# Altium PCB DO NOT USE LKAS-EPS_PCB_V2I3.PcbDoc (part 1 of 2)
Units mil, origin at the board's own origin, x right, y up, seen from the top; angles counter-clockwise.
Board outline 2098 x 1350 mil, 4 copper layers (Top Layer, Layer 1, Layer 2, Bottom Layer), stack 23.712 mil thick; 50 components, 66 nets, 279 pads, 105 vias.
Unrouted connection lines stored in the file: 1.
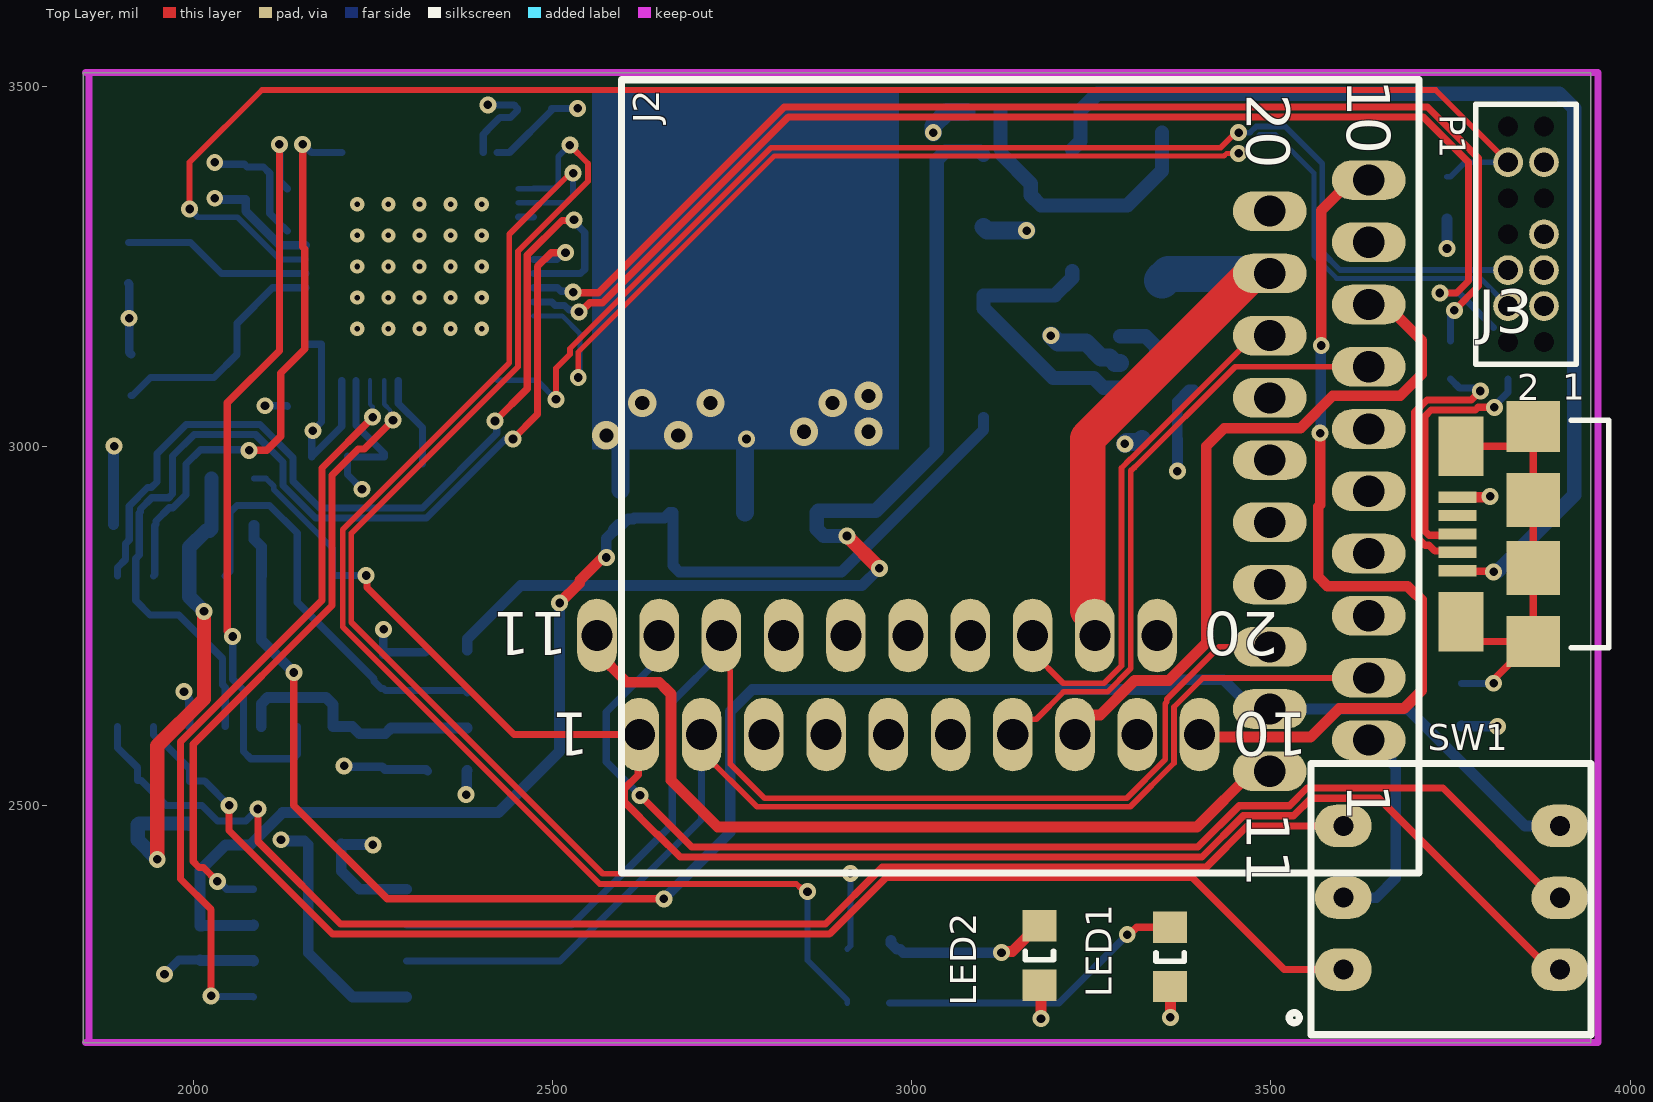
[diagram p0: Top Layer view]
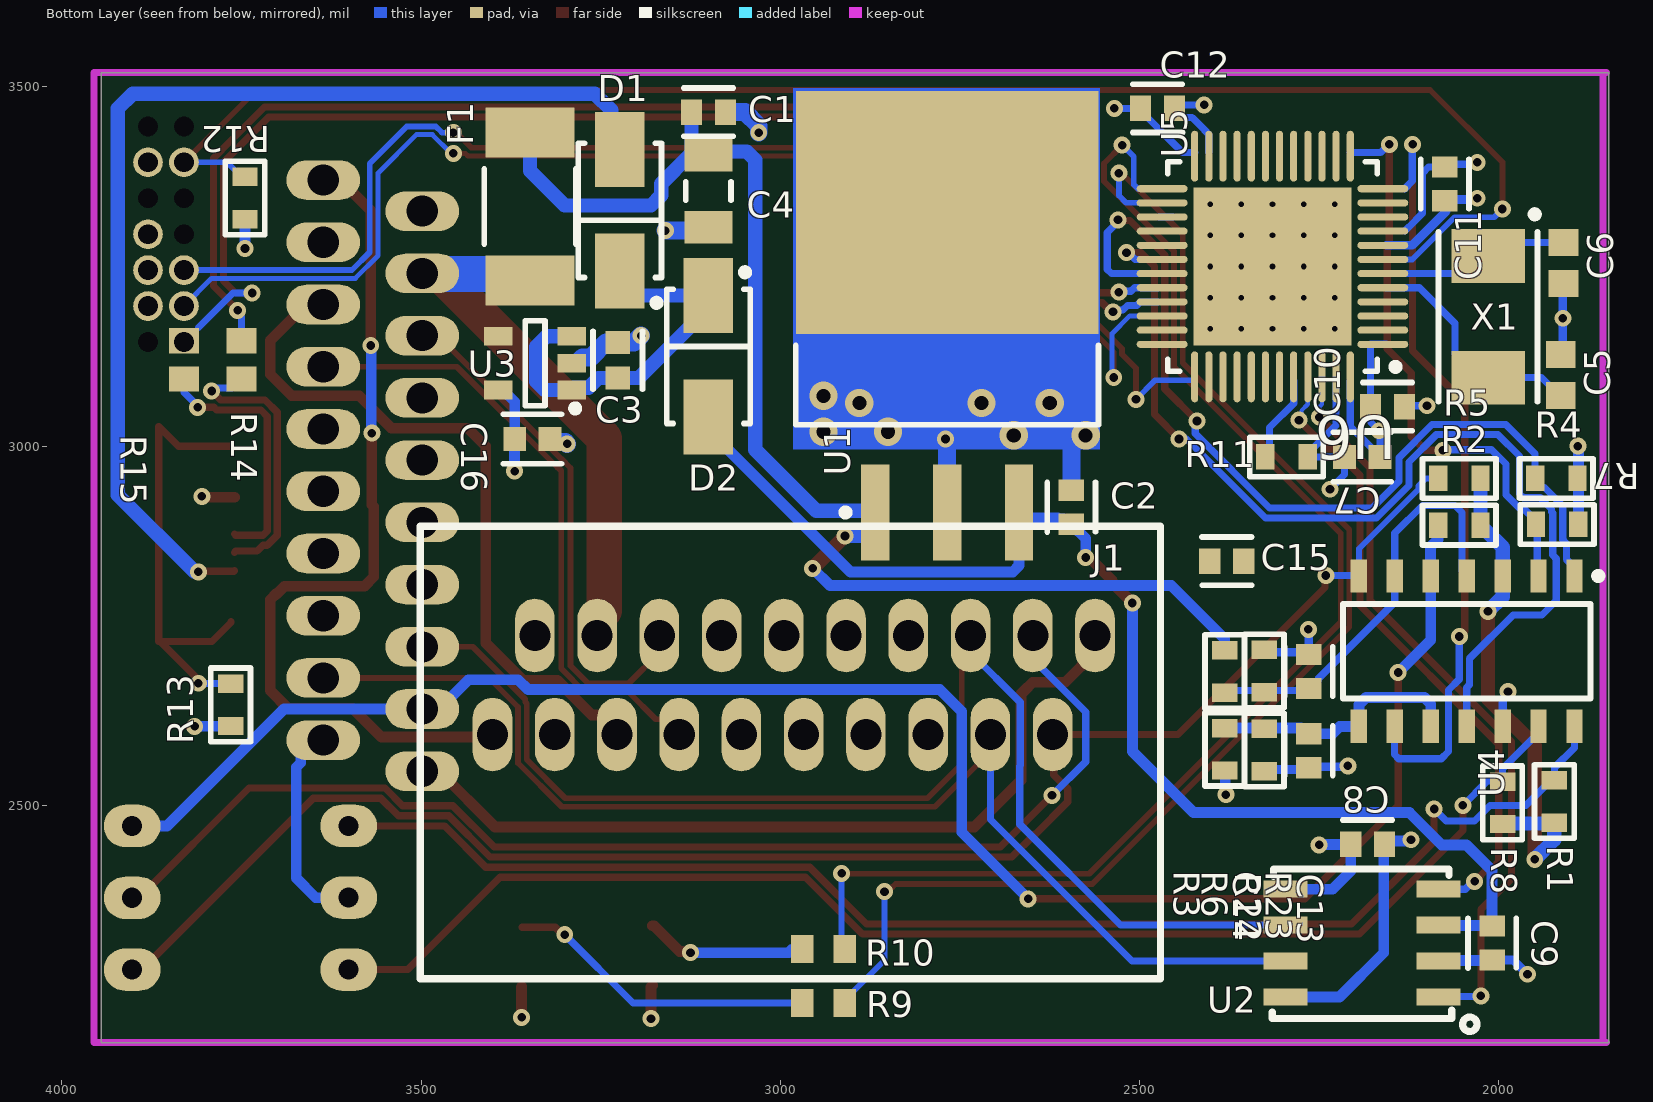
[diagram p1: Bottom Layer view, seen from below]
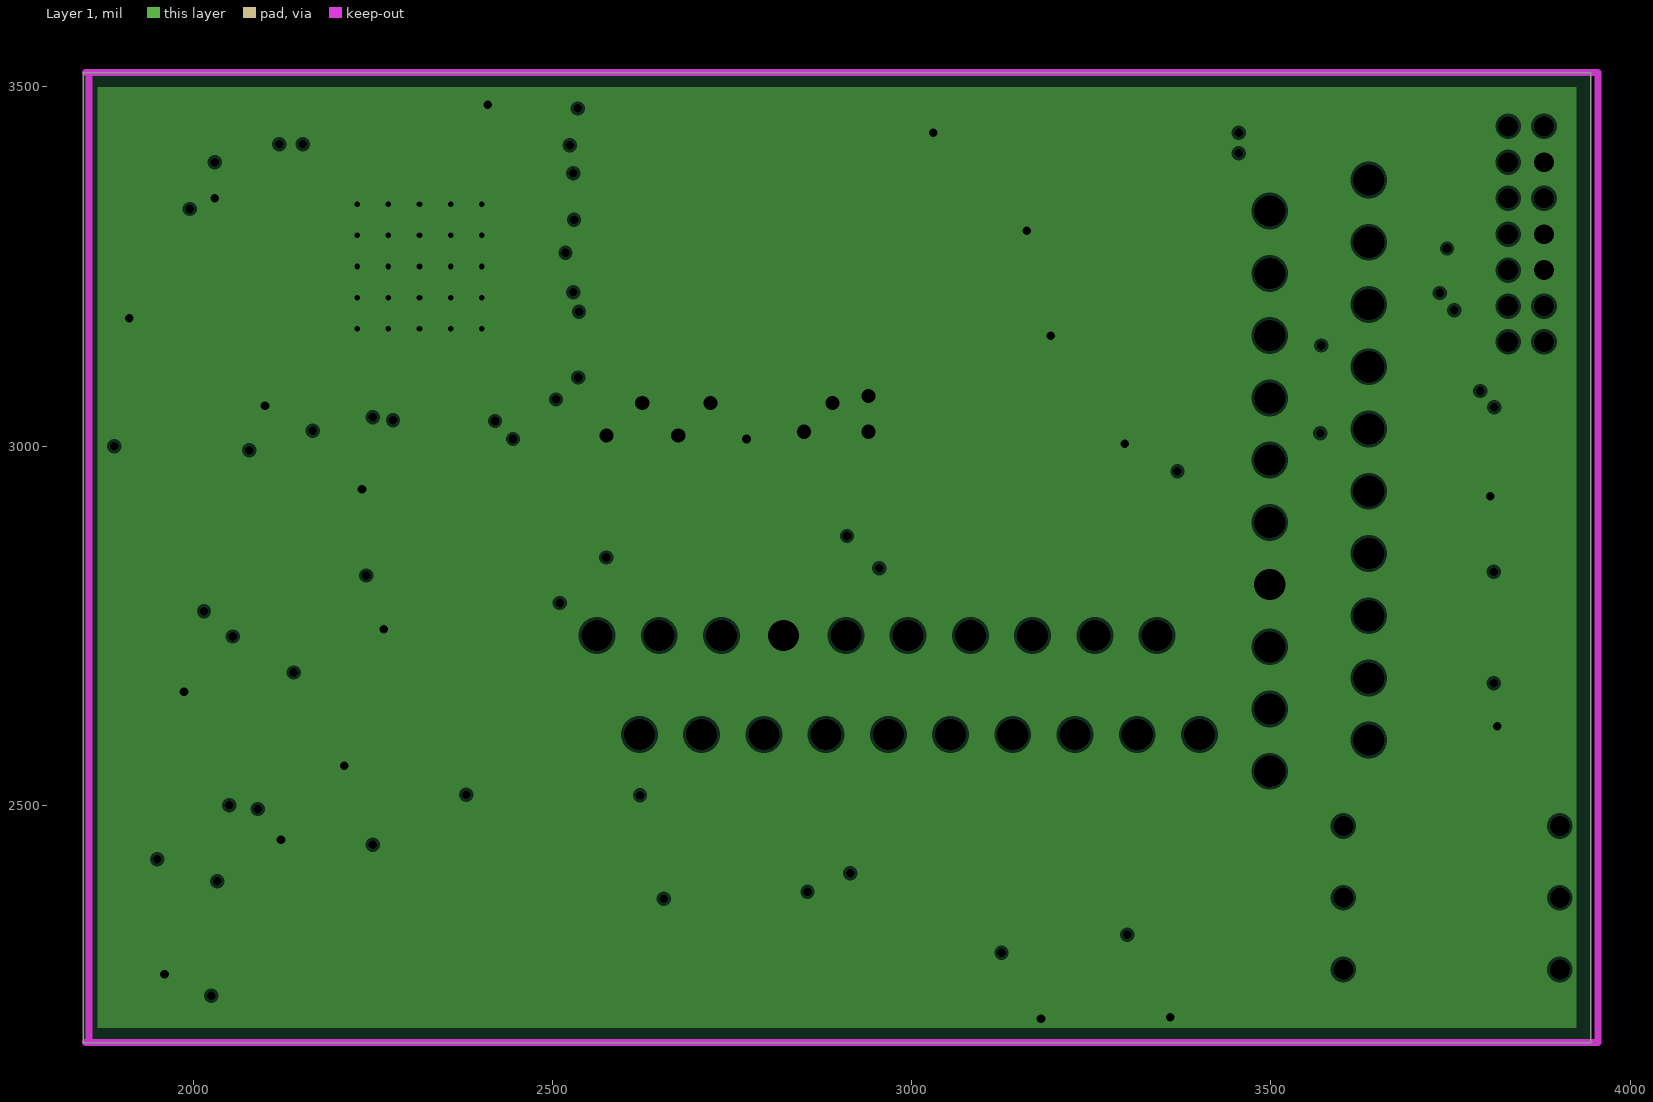
[diagram p2: Layer 1, clearances drawn from the general rule]
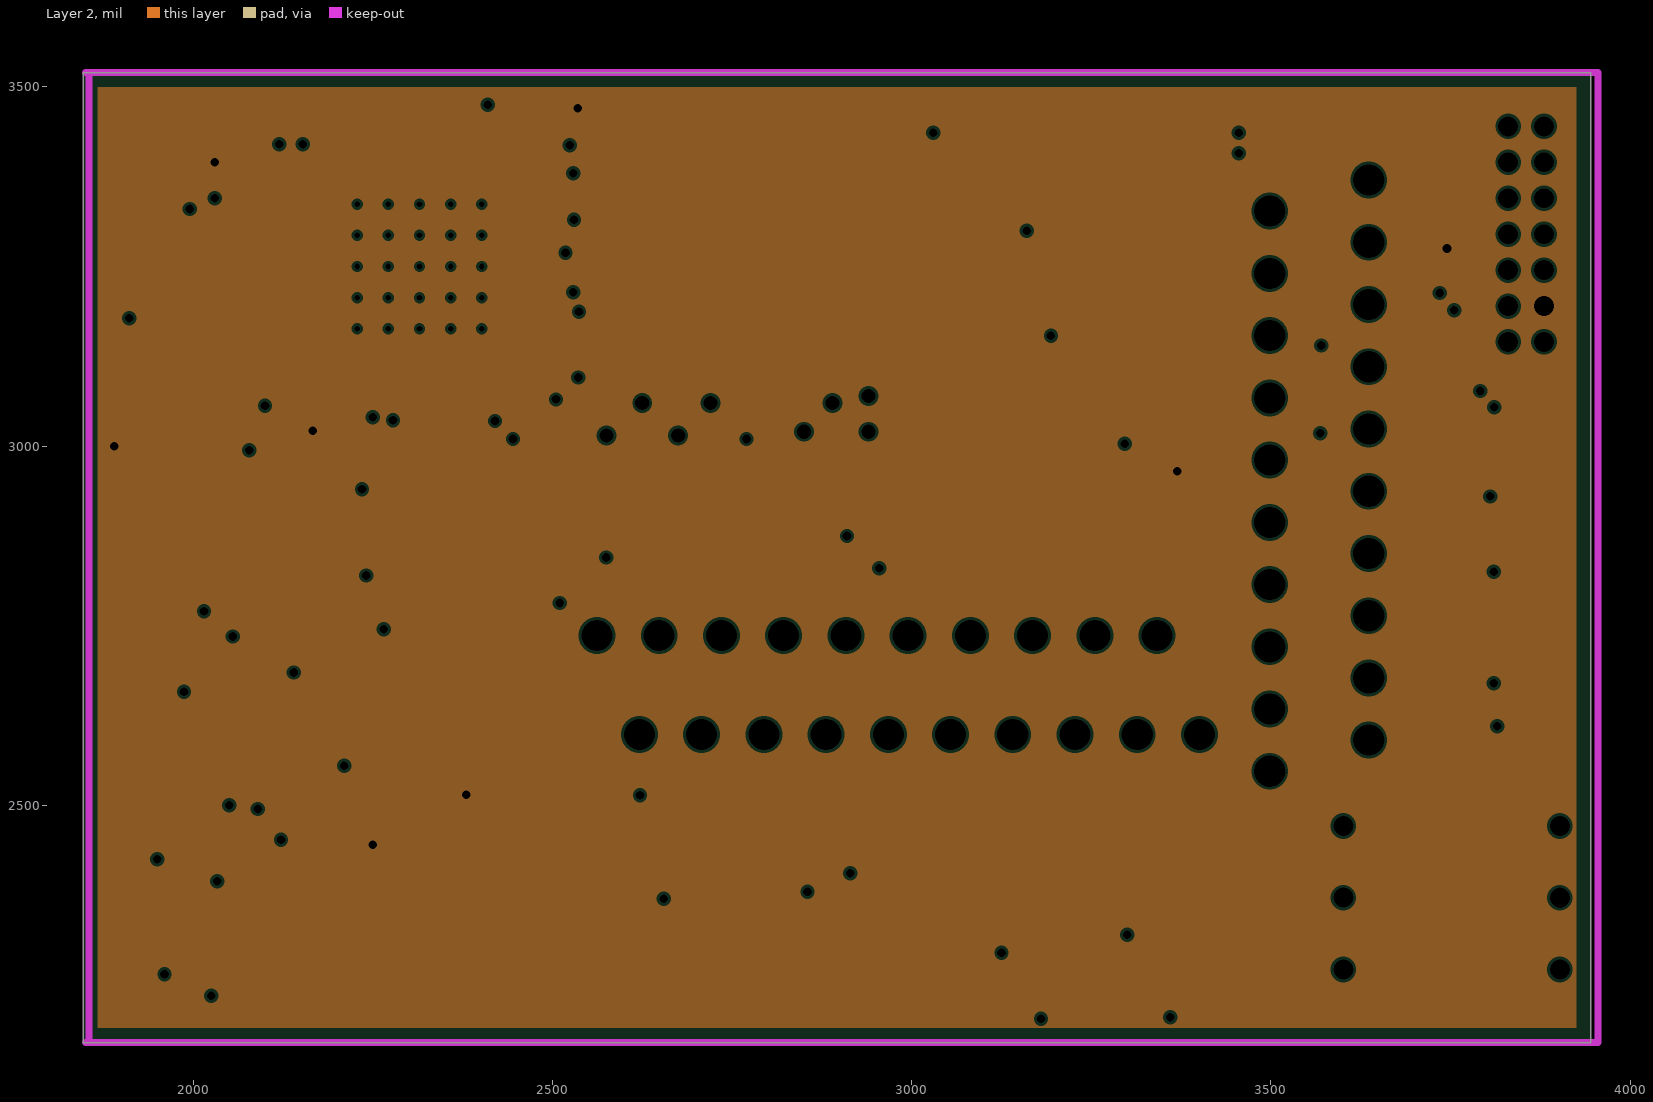
[diagram p3: Layer 2, clearances drawn from the general rule]

## Layer stack, top to bottom
Top Solder: solder mask 0.4, Solder Resist, Dk 3.5
Top Layer: signal copper 1.378
Dielectric 1: prepreg 2.8, PP-006, Dk 4.1
Layer 1: plane copper 1.378, net GND
Dielectric1: dielectric 12.6, FR-4, Dk 4.8
Layer 2: plane copper 1.378, net +3V3
Dielectric 2: prepreg 2.8, PP-006, Dk 4.1
Bottom Layer: signal copper 1.378
Bottom Solder: solder mask 0.4, Solder Resist, Dk 3.5

## Board outline
1847,2170 3945,2170 3945,3520 1847,3520

## Design rules (kind name [scope] priority, off if disabled: settings)
BoardOutlineClearance [All] p1: gap=7.87 ignorepadtopadclearanceinfootprint=FALSE
Clearance [All] p1: gap=4 ignorepadtopadclearanceinfootprint=FALSE except(5: Arc-Via Track-Via SMDPad-Via THPad-Via Via-Via Via-Fill Via-Poly Via-Region Via-Text; 9.84: Arc-Hole Track-Hole SMDPad-Hole THPad-Hole Via-Hole Fill-Hole Poly-Hole Region-Hole Text-Hole)
ComponentClearance [All] p1: gap=4 collisioncheckmode=3 verticalgap=4 showdistances=TRUE
DiffPairsRouting [All] p1: maxlimit=4 minlimit=4 mostfreqgap=4 toplayer_minwidth=4 toplayer_maxwidth=71497.94 toplayer_prefwidth=4 bottomlayer_minwidth=4 bottomlayer_maxwidth=71497.94 bottomlayer_prefwidth=4 maxuncoupledlength=500
Height [All] p1: minheight=0 maxheight=71497.94 prefheight=500
HoleSize [All] p1: absolutevalues=TRUE maxlimit=248.03 minlimit=7.87 maxpercent=80.000 minpercent=20.000
HoleToHoleClearance [All] p1: gap=9.84 allowstackedmicrovias=FALSE
MatchedLengths "Schematic Matched Net Lengths" [InNet('USB_N')] p1: tolerance=150 checknetsindiffpair=FALSE checkdiffpairvsdiffpair=TRUE checkxsignals=TRUE checkothers=TRUE
MinimumAnnularRing [All] p1: minimumring=3
MinimumSolderMaskSliver [All] p1: minsoldermaskwidth=0
PlaneClearance [All] p1: clearance=4
PlaneConnect PlaneConnectPowerPads [InPadClass('PowerPads')] p1: planeconnectstyle=Direct reliefexpansion=20 reliefentries=4 reliefconductorwidth=10 reliefairgap=10
PlaneConnect [All] p2: pad.planeconnectstyle=Relief pad.reliefexpansion=11.81 pad.reliefentries=4 pad.reliefconductorwidth=4 pad.reliefairgap=4 via.planeconnectstyle=Direct via.reliefexpansion=11.81 via.reliefentries=4 via.reliefconductorwidth=5 via.reliefairgap=5
PolygonConnect PolygonConnectPowerPads [All vs (InPadClass('PowerPads'))] p1: connectstyle=Direct reliefconductorwidth=10 reliefentries=4 polygonreliefangle="90 Angle" airgapwidth=10
PolygonConnect [All] p2: thpad.connectstyle=Relief thpad.reliefconductorwidth=4 thpad.reliefentries=4 thpad.polygonreliefangle="90 Angle" thpad.airgapwidth=4 smdpad.connectstyle=Relief smdpad.reliefconductorwidth=4 smdpad.reliefentries=4 smdpad.polygonreliefangle="90 Angle" smdpad.airgapwidth=4 via.connectstyle=Direct via.reliefconductorwidth=5 via.reliefentries=4 via.polygonreliefangle="90 Angle" via.airgapwidth=5
RoutingVias [All] p1: holewidth=7.87 width=17.72 viastyle="Through Hole" minholewidth=7.87 minwidth=17.72 maxholewidth=248.03 maxwidth=257.87
SilkToSilkClearance [All] p1: silktosilkclearance=0
SilkToSolderMaskClearance [IsPad] p1: minsilkscreentomaskgap=4 clearancetoexposedcopper=TRUE
SolderMaskExpansion [All] p1: expansion=2.95 istentingtop=FALSE
UnRoutedNet [All] p1: checkbadconnections=TRUE
Width [All] p1: maxlimit=71497.94 minlimit=4 preferedwidth=6 minimp=50.000000 maximp=50.000000 favimp=50.000000
19 further rules are at their usual default settings.

## Classes and differential pairs
differential pair USB_R: +USB_R_P -USB_R_N
differential pair USB: +USB_P -USB_N

## Components (designator, comment, footprint, x,y, rotation, side; value= is the part's Value field where it differs from the comment)
C1 "C0603C104M3RACTU" FP-C0603C-CF-MFG 3100,3465 r180 bottom value="0.10 μF"
C2 "C0603C104M3RACTU" FP-C0603C-CF-MFG 2595,2915 r90 bottom value="0.10 μF"
C3 "CL10B475KQ8NQNC" FP-CL10-IPC_C 3226.31,3119.48 r90 bottom value=4.7uF
C4 "CL31A106KBHNNNE" FP-CL31-IPC_C 3100,3355 r270 bottom value=10uF
C5 "GRM1885C1H220JA01D" CAPC1608X90X35ML10T15 1913.74,3099.09 r90 bottom
C6 "GRM1885C1H220JA01D" CAPC1608X90X35ML10T15 1910,3255 r270 bottom
C7 "CL10B475KQ8NQNC" FP-CL10-IPC_C 2190,2985 r0 bottom value=4.7uF
C8 "C0603C104M3RACTU" FP-C0603C-CF-MFG 2182.56,2446.18 r180 bottom value="0.10 μF"
C9 "C0603C104M3RACTU" FP-C0603C-CF-MFG 2009.33,2308.39 r270 bottom value="0.10 μF"
C10 "C0603C104M3RACTU" FP-C0603C-CF-MFG 2155,3055 r180 bottom value="0.10 μF"
C11 "C0603C104M3RACTU" FP-C0603C-CF-MFG 2075,3365 r270 bottom value="0.10 μF"
C12 "C0603C104M3RACTU" FP-C0603C-CF-MFG 2475,3470 r180 bottom value="0.10 μF"
C13 "C0603C104M3RACTU" FP-C0603C-CF-MFG 2264.56,2686.36 r90 bottom value="0.10 μF"
C14 "C0603C104M3RACTU" FP-C0603C-CF-MFG 2264.44,2576.1 r270 bottom value="0.10 μF"
C15 "C0603C104M3RACTU" FP-C0603C-CF-MFG 2378.62,2840 r180 bottom value="0.10 μF"
C16 "CL10B475KQ8NQNC" FP-CL10-IPC_C 3345,3010 r180 bottom value=4.7uF
D1 "SS14" FP-403AE-MFG 3223.31,3328.13 r270 bottom
D2 "SS14" FP-403AE-MFG 3100,3125 r90 bottom
F1 "1812L050/30PR" LFUS-1812L05030PR_V 3348.31,3333.53 r90 bottom
J1 "MX34020SF1" MX34020SF1 3391,2808.63 r180 bottom locked
J2 "MX34020NF1" MX34020NF1 3636.14,3370.32 r270 top locked
J3 "10118192-0001LF" FCI-10118192-0001LF-5_V 3865,2877.76 r90 top
LED1 "150080SS75000" 0805_A 3359.68,2289.09 r90 top
LED2 "150080BS75000" 0805_A 3177.68,2291.09 r90 top
P1 "62201421121" 62201421121 3855,3295 r90 top
R1 "4K7" R0603 1922.72,2505.24 r270 bottom
R2 "4K7" R0603 2055,2890 r180 bottom
R3 "4K7" R0603 2381.44,2578.1 r270 bottom
R4 "4K7" R0603 1918.78,2891.06 r180 bottom
R5 "4K7" R0603 2055,2955 r180 bottom
R6 "4K7" R0603 2326.44,2577.1 r90 bottom
R7 "4K7" R0603 1920,2955 r180 bottom
R8 "4K7" R0603 1994.81,2503.59 r270 bottom
R9 "RC0603FR-07560RL" RESC1608X55X25ML10T15 2940,2225 r0 bottom
R10 "RC0603FR-07560RL" RESC1608X55X25ML10T15 2940,2300 r0 bottom
R11 "4K7" R0603 2295.47,2985.01 r0 bottom
R12 "4K7" R0603 3745.01,3345.47 r270 bottom
R13 "4K7" R0603 3765,2640 r270 bottom
R14 "CRCW060322R0JNTA" RESC1609X50X30ML10T20 3750,3120 r270 bottom value=22R
R15 "CRCW060322R0JNTA" RESC1609X50X30ML10T20 3830,3120 r270 bottom value=22R
R22 "4K7" R0603 2381.44,2686.34 r90 bottom
R23 "4K7" R0603 2326.44,2686.86 r270 bottom
SW1 "76STC02T" 76STC02T 3751.35,2371.47 r90 top
U1 "UA7805CKTTR" KTT0003A_V 2767.83,3167.56 r90 bottom
U2 "MCP2562FD-E/SN" MCP2561 2190.43,2308.39 r0 bottom
U3 "MIC5504-3.3YM5-TR" FP-SOT23-5LD-PL-1-MFG 3341.31,3115.48 r0 bottom
U4 "LM339DR2G" ONSC-SOIC-14-751A-03_V 2044.71,2714.61 r270 bottom
U5 "STM32F103C6T7ATR" STM-LQFP48_L 2315,3250 r0 bottom
U6 "STM32F103C6U6A" STM-UFQFPN48_M 2315,3250 r0 bottom
X1 "ABM7-8.000MHZ-D2Y-T" ABRA-ABM7-2_V 2015,3180 r270 bottom

## Footprints (in the part's own frame and the unit in brackets; to place one, negate y for a bottom-side part, rotate by r counter-clockwise, add the part's x,y. Pads: shape width x height; smd on the part's side, far side on the other; paste and mask are expansions set on the pad)
76STC02T [mm] "Switch Rocker Arm"
  oval 1.5x2 hole 0.71: 1A(-2.538,3.827) 1B(-2.542,-3.827) 2A(2.542,3.827) 2B(2.538,-3.827) C1(0.002,3.827) C2(-0.002,-3.827)
  silkscreen extent -4.85,-4.93 4.75,5.74
0805_A [mm] "Chip LED, 2-Leads, Body 2.0x1.3mm, IPC Medium Density"
  rect 1.1x1.2 smd: 1(-1.05,0) 2(1.05,0)
  silkscreen extent -0.15,-0.5 0.15,0.5, body extent -1,-0.63 1,0.62, height 0.68
62201421121 [mm] "Pin Header, pitch 1.27 mm, THT, Vertical, dual row, 14p"
  round 0 hole 0.7 unplated: 1(-3.81,-0.635) 2(-3.81,0.635) 8(0,0.635) 9(1.27,-0.635) 10(1.27,0.635) 13(3.81,-0.635) 14(3.81,0.635)
  round 1.05 hole 0.7: 3(-2.54,-0.635) 4(-2.54,0.635) 5(-1.27,-0.635) 6(-1.27,0.635) 7(0,-0.635) 11(2.54,-0.635) 12(2.54,0.635)
  silkscreen extent -4.59,-1.78 4.59,1.78, body extent -4.44,-1.7 4.45,1.7, height 5.33
ABRA-ABM7-2_V [mm] "SMD, 2-Leads, Body 6x3.5mm"
  rect 1.9x2.6 smd: 1(-2.15,0) 2(2.15,0)
  silkscreen extent -3.75,-1.75 3,1.78, body extent -3,-1.75 3,1.75, height 1.4
CAPC1608X90X35ML10T15 [mm] "Chip Capacitor, 2-Leads, Body 1.7x0.9mm, IPC Low Density"
  rect 0.95x1.05 smd: 1(-0.725,0) 2(0.725,0)
  body extent -0.85,-0.45 0.85,0.45, height 0.9
FCI-10118192-0001LF-5_V [mm] "SMD, 5-Leads, Body 8.05x5.77mm, Pitch 0.65mm"
  rect 0.4x1.35 smd: 1(-1.3,2.675) 2(-0.65,2.675) 3(0,2.675) 4(0.65,2.675) 5(1.3,2.675)
  rect 2.1x1.6 smd: 6(-3.1,2.55) 7(3.1,2.55)
  rect 1.8x1.9 smd: 8(-3.8,0) 9(3.8,0)
  rect 1.9x1.9 smd: 10(-1.2,0) 11(1.2,0)
  silkscreen extent -4.03,-2.67 4.03,-1.35, body extent -4.03,-2.67 4.03,3.1, height 2.7
FP-403AE-MFG [mm]
  rect 2.65x1.75 smd paste+0 mask+0: 1(-2.15,0) 2(2.15,0)
  silkscreen extent -2.37,-1.48 3.39,1.48, body extent -2.6,-1.36 2.6,1.36, height 2.5
FP-C0603C-CF-MFG [mm]
  rect 0.75x0.9 smd paste+0 mask+0: 1(-0.6,0) 2(0.6,0)
  silkscreen extent -0.87,-0.85 0.88,0.85, body extent -0.8,-0.4 0.8,0.4, height 0.87
FP-CL10-IPC_C [mil]
  rect 31.73x33.79 smd paste+0 mask+0: 1(-24.65,0) 2(24.65,0)
  silkscreen extent -41,-34 41,34, body extent -31,-16 31,16, height 37
FP-CL31-IPC_C [mil]
  rect 45.45x67.17 smd: 1(-50.23,0) 2(50.23,0)
  silkscreen extent -13,-31 13,31, body extent -63,-31 63,31, height 71
FP-SOT23-5LD-PL-1-MFG [mm]
  rect 1x0.66 smd paste+0 mask+0: 1(-1.3,0.95) 2(-1.3,0) 3(-1.3,-0.95) 4(1.3,-0.95) 5(1.3,0.95)
  silkscreen extent -1.54,-1.5 0.35,1.72, body extent -1.4,-1.45 1.4,1.45, height 1.45
KTT0003A_V [mm] "DPAK, 3-Leads, Body 10.65x9.65mm, Pitch 2.54mm"
  rect 3.4x1 smd: 1(-6.6,2.54) 2(-6.6,0) 3(-6.6,-2.54)
  rect 8.6x10.7 smd: 4(4,0)
  silkscreen extent -6.72,-5.35 -0.7,5.35, body extent -6.68,-5.32 8.56,5.32, height 4.83
LFUS-1812L05030PR_V [mm] "SMD, 2-Leads, Body 4.55x3.24mm"
  rect 1.78x3.15 smd: 1(-2.615,0) 2(2.615,0)
  silkscreen extent -1.33,-1.62 1.33,1.62, body extent -2.27,-1.62 2.27,1.62, height 1
MCP2561 [mm] "SOIC 8 SN type"
  rect 1.55x0.6 smd: 1(-2.7,1.905) 2(-2.7,0.635) 3(-2.7,-0.635) 4(-2.7,-1.905) 5(2.7,-1.905) 6(2.7,-0.635) 7(2.7,0.635) 8(2.7,1.905)
  silkscreen extent -4.06,-2.62 3.17,3.12, body extent -3,-2.45 3,2.45, height 1.75
MX34020NF1 [mm] "Receptical with male pins"
  oval 1.4x2.6 hole 1.1: 1(19.8,0) 2(17.6,0) 3(15.4,0) 4(13.2,0) 5(11,0) 6(8.8,0) 7(6.6,0) 8(4.4,0) 9(2.2,0) 10(0,0) 11(20.9,-3.5) 12(18.7,-3.5) 13(16.5,-3.5) 14(14.3,-3.5) 15(12.1,-3.5) 16(9.9,-3.5) 17(7.7,-3.5) 18(5.5,-3.5) 19(3.3,-3.5) 20(1.1,-3.5)
  round 0 all layers, no hole: ""(-0.5,-9.3) ""(21.5,-9.3)
  silkscreen extent -3.55,-26.42 24.5,1.78, body extent -3.56,-26.21 24.34,0.31, height 16
MX34020SF1 [mm] "Plug without pins"
  oval 1.4x2.6 hole 1.1: 1(19.558,-5.334) 2(17.358,-5.334) 3(15.158,-5.334) 4(12.958,-5.334) 5(10.758,-5.334) 6(8.558,-5.334) 7(6.358,-5.334) 8(4.158,-5.334) 9(1.958,-5.334) 10(-0.242,-5.334) 11(21.058,-1.834) 12(18.858,-1.834) 13(16.658,-1.834) 14(14.458,-1.834) 15(12.258,-1.834) 16(10.058,-1.834) 17(7.858,-1.834) 18(5.658,-1.834) 19(3.458,-1.834) 20(1.258,-1.834)
  silkscreen extent -2.79,-13.97 23.37,2.03, body extent -2.39,-13.75 22.71,1.45, height 21
ONSC-SOIC-14-751A-03_V [mm] "SOIC, 14-Leads, Body 8.75x4mm, Pitch 1.27mm"
  rect 1.18x0.58 smd: 1(-2.66,3.81) 2(-2.66,2.54) 3(-2.66,1.27) 4(-2.66,0) 5(-2.66,-1.27) 6(-2.66,-2.54) 7(-2.66,-3.81) 8(2.66,-3.81) 9(2.66,-2.54) 10(2.66,-1.27) 11(2.66,0) 12(2.66,1.27) 13(2.66,2.54) 14(2.66,3.81)
  silkscreen extent -2.78,-4.37 1.67,4.77, body extent -2,-4.38 2,4.38, height 1.75
R0603 [mm]
  rect 0.65x0.9 smd: 1(-0.75,0) 2(0.75,0)
  silkscreen extent -1.3,-0.7 1.3,0.7, body extent -1.05,-0.4 1.05,0.4, height 0.5
RESC1608X55X25ML10T15 [mm] "Chip Resistor, 2-Leads, Body 1.70x0.90mm, IPC Low Density"
  rect 0.8x1 smd: 1(-0.75,0) 2(0.75,0)
  body extent -0.85,-0.45 0.85,0.45, height 0.55
RESC1609X50X30ML10T20 [mm] "Chip Resistor, 2-Leads, Body 1.55x0.85mm, IPC Low Density"
  rect 0.9x1.05 smd: 1(-0.675,0) 2(0.675,0)
  body extent -0.82,-0.48 0.82,0.48, height 0.5
STM-LQFP48_L [mm] "QFP, 48-Leads, Body 7x7mm, Pitch 0.5mm, IPC High Density"
  oval 1.55x0.25 smd: 1(-4.025,2.75) 2(-4.025,2.25) 3(-4.025,1.75) 4(-4.025,1.25) 5(-4.025,0.75) 6(-4.025,0.25) 7(-4.025,-0.25) 8(-4.025,-0.75) 9(-4.025,-1.25) 10(-4.025,-1.75) 11(-4.025,-2.25) 12(-4.025,-2.75) 25(4.025,-2.75) 26(4.025,-2.25) 27(4.025,-1.75) 28(4.025,-1.25) 29(4.025,-0.75) 30(4.025,-0.25) 31(4.025,0.25) 32(4.025,0.75) 33(4.025,1.25) 34(4.025,1.75) 35(4.025,2.25) 36(4.025,2.75)
  oval 0.25x1.55 smd: 13(-2.75,-4.025) 14(-2.25,-4.025) 15(-1.75,-4.025) 16(-1.25,-4.025) 17(-0.75,-4.025) 18(-0.25,-4.025) 19(0.25,-4.025) 20(0.75,-4.025) 21(1.25,-4.025) 22(1.75,-4.025) 23(2.25,-4.025) 24(2.75,-4.025) 37(2.75,4.025) 38(2.25,4.025) 39(1.75,4.025) 40(1.25,4.025) 41(0.75,4.025) 42(0.25,4.025) 43(-0.25,4.025) 44(-0.75,4.025) 45(-1.25,4.025) 46(-1.75,4.025) 47(-2.25,4.025) 48(-2.75,4.025)
  body extent -3.5,-3.5 3.5,3.5, height 1.6
STM-UFQFPN48_M [mm] "QFN, 48-Leads, Body 7.1x7.1mm, Pitch 0.5mm, Thermal Pad 5.6x5.6mm, IPC Low Density"
  oval 1x0.25 smd: 1(-3.5,2.75) 2(-3.5,2.25) 3(-3.5,1.75) 4(-3.5,1.25) 5(-3.5,0.75) 6(-3.5,0.25) 7(-3.5,-0.25) 8(-3.5,-0.75) 9(-3.5,-1.25) 10(-3.5,-1.75) 11(-3.5,-2.25) 12(-3.5,-2.75) 25(3.5,-2.75) 26(3.5,-2.25) 27(3.5,-1.75) 28(3.5,-1.25) 29(3.5,-0.75) 30(3.5,-0.25) 31(3.5,0.25) 32(3.5,0.75) 33(3.5,1.25) 34(3.5,1.75) 35(3.5,2.25) 36(3.5,2.75)
  oval 0.25x1 smd: 13(-2.75,-3.5) 14(-2.25,-3.5) 15(-1.75,-3.5) 16(-1.25,-3.5) 17(-0.75,-3.5) 18(-0.25,-3.5) 19(0.25,-3.5) 20(0.75,-3.5) 21(1.25,-3.5) 22(1.75,-3.5) 23(2.25,-3.5) 24(2.75,-3.5) 37(2.75,3.5) 38(2.25,3.5) 39(1.75,3.5) 40(1.25,3.5) 41(0.75,3.5) 42(0.25,3.5) 43(-0.25,3.5) 44(-0.75,3.5) 45(-1.25,3.5) 46(-1.75,3.5) 47(-2.25,3.5) 48(-2.75,3.5)
  rect 5.6x5.6 smd: 49(0,0)
  silkscreen extent -4.47,-3.7 3.7,3.7, body extent -3.55,-3.55 3.55,3.55, height 0.6

## Part data
C1 C2 C8 C9 C10 C11 C12 C13 C14 C15: library part CMP-2006-03065-2, "CAP CER 0.1UF 25V X7R 0603", Capacitance="0.1 μF", Manufacturer=KEMET, Package=C0603C-CF, Temperature="-55°C to +125°C", Temperature Characteristic=X7R, Temperature Coefficient=30ppm/°C, Temperature Range High=+125°C, Temperature Range Low=-55°C, Tolerance=0.2, Voltage Rating="25 V", Automotive=Yes, Automotive Grade="Grade 1", Category=Cap, ComponentLink2Description=Datasheet, ComponentLink2URL=https://api.kemet.com/component-edge/download/datasheet/C0603C100J5GACAUTO.pdf, Device Class L1="Passive Components", Device Class L2=Capacitors, Device Class L3="Ceramic Capacitors", Digikey Description="CAP CER 0.1UF 25V X7R 0603", Height=0.87mm, Lead Free=Yes, Manufacturer Part Number=C0603C104M3RACTU, Material=Ceramic, Mouser Description="Multilayer Ceramic Capacitors MLCC - SMD/SMT 25volts 0.1uF X7R 20%", Octopart=https://octopart.com/c0603c104m3ractu-kemet-95914, RoHS=TRUE
C3 C7 C16: library part CMP-2000-06096-2, "CAP CER 4.7UF 6.3V X7R 0603", Capacitance=4.7uF, Manufacturer=Samsung, Package=CL10, Temperature="-55°C to +125°C", Temperature Characteristic=X7R, Temperature Coefficient=15%, Temperature Range High=+125°C, Temperature Range Low=-55°C, Tolerance=10%, Voltage Rating=6.3V, Automotive=No, Category=Cap, ComponentLink2Description=Datasheet, ComponentLink2URL=http://www.samsungsem.com/kr/support/product-search/mlcc/__icsFiles/afieldfile/2018/07/24/CL10B475KQ8NQNC.pdf, Device Class L1="Passive Components", Device Class L2=Capacitors, Device Class L3="Ceramic Capacitors", Digikey Description="CAP CER 4.7UF 6.3V X7R 0603", Height=0.95mm, Ipc Land Pattern Name=CAPC16080X80, Lead Free=Yes, Manufacturer Part Number=CL10B475KQ8NQNC, Material=Ceramic, Mouser Description="C Series 0402 4.7 uF 6.3 V ±20 % Tolerance X5R SMT Multilayer Ceramic Capacitor", Octopart=https://octopart.com/cl10b475kq8nqnc-samsung-24957976, RoHS=TRUE
C4: library part CMP-13271-000016-1, "CAP CER 10UF 50V X5R 1206", Capacitance=10uF, Manufacturer=Samsung, Package=CL31, Temperature="-55°C to +85°C", Temperature Characteristic=X5R, Temperature Coefficient=15%, Temperature Range High=+85°C, Temperature Range Low=-55°C, Tolerance=10%, Voltage=50V, Automotive=No, Category=Cap, ComponentLink2Description=Datasheet, ComponentLink2URL=http://www.samsungsem.com/kr/support/product-search/mlcc/__icsFiles/afieldfile/2018/06/21/CL31A106KBHNNNE.pdf, Device Class L1="Passive Components", Device Class L2=Capacitors, Device Class L3="Ceramic Capacitors", Digikey Description="CAP CER 10UF 50V X5R 1206", Height=1.8mm, Ipc Land Pattern Name=CAPC320160X160, Lead Free=Yes, Manufacturer Part Number=CL31A106KBHNNNE, Material=Ceramic, Octopart=https://octopart.com/cl31a106kbhnnne-samsung-19832778, RoHS=TRUE, Voltage Rating=50V
C5 C6: library part CMP-2000-04945-1, "Chip Capacitor, 22 pF, +/- 5%, 50 V, -55 to 125 degC, 0603 (1608 Metric), RoHS, Tape and Reel", Capacitance=22pF, Case Size/Dimension=0603, Dielectric=C0G, Manufacturer=Murata, Package Description="2-Pin Surface Mount Device, Body 1.6 x 0.8 mm", Package Reference=603, Rated Voltage=50V, Tolerance (%)=±5%, Datasheet URL=https://datasheet.ciiva.com/11786/0900766b807a1cab-11786398.pdf, Datasheet Version=Jul-06, Manufacturer URL=http://www.murata.com/
D1 D2: library part CMP-2000-04943-2, "DIODE SCHOTTKY 40V 1A SMA", Forward Current=1A, Manufacturer="ON Semiconductor", Max Junction Temp=+125°C, Max Repetitive Reverse Voltage=40V, Max Surge Forward Current=40A, Package=403AE, Peak Reverse Current=0.2mA, Temperature="-65°C to +125°C", Temperature Range Low=-65°C, Automotive=No, Category=Diode, ComponentLink2Description=Datasheet, ComponentLink2URL=https://www.onsemi.com/pub/Collateral/SS19-D.PDF, Device Class L1="Discrete Semiconductors", Device Class L2=Diodes, Device Class L3="Schottky Diodes", Digikey Description="DIODE SCHOTTKY 40V 1A SMA", Height=2.5mm, Lead Free=Yes, Manufacturer Part Number=SS14, Mouser Description="Schottky Diodes & Rectifiers SMA 40V 1.0A", Octopart=https://octopart.com/ss14-on+semiconductor-29205033, RoHS=TRUE, Standoff Height=0.05mm, Temperature Range High=+125°C
F1: library part CMP-2000-05508-1, "PTC Resettable Fuse, 0.8 W, 30 V, -40 to 85 degC, 2-Pin SMD, RoHS, Tape and Reel", Current - Hold (Ih) (Max)=500mA, Current - Max=100A, Current - Trip (It)=1A, Manufacturer=Littelfuse-Inc., Package / Case=1812(4532Metric),Concave, Package Description="2-Pin Surface Mount Device, Body 4.55 x 3.24 mm", Package Reference=1812, Voltage - Max=30V, Category=CircuitProtection, Datasheet URL=http://www.littelfuse.com/~/media/electronics/datasheets/resettable_ptcs/littelfuse_ptc_1812l_datasheet.pdf.pdf, Datasheet Version=02/2016, Family=PTCResettableFuses, Manufacturer URL=http://www.littelfuse.com/, Mounting Technology=SurfaceMount, Packaging=Tape&Reel(TR), R Min/Max=0.150~1.000Ohm, Series=POLY-FUSE®,1812L, Time to Trip=0.15s
J1: "Automotive Connectors Sckt HOUSING 20P", Color=Grey, Current Rating=3A, Manufacturer="JAE Electronics", Max Operating Temperature=85°C, Min Operating Temperature=-40°C, Package Quantity=192, Supplier Part Number 1=670-2925-ND, Category=Connectors, ComponentLink1Description=https://datasheet.ciiva.com/11742/0900766b80fc15d5-11742077.pdf?src-supplier=RSComponents, ComponentLink1URL=https://datasheet.ciiva.com/11742/0900766b80fc15d5-11742077.pdf?src-supplier=RSComponents, ComponentLink2Description=https://datasheet.ciiva.com/4553/sj038752-64597-4553699.pdf?src-supplier=Mouser, ComponentLink2URL=https://datasheet.ciiva.com/4553/sj038752-64597-4553699.pdf?src-supplier=Mouser, ComponentLink3Description=https://datasheet.ciiva.com/6739/614004-6739335.pdf?src-supplier=Newark, ComponentLink3URL=https://datasheet.ciiva.com/6739/614004-6739335.pdf?src-supplier=Newark, ComponentLink4Description=https://datasheet.ciiva.com/762/transportation-pg-v2-2-762885.pdf?src-supplier=Digi-Key, ComponentLink4URL=https://datasheet.ciiva.com/762/transportation-pg-v2-2-762885.pdf?src-supplier=Digi-Key, ComponentLink5Description=https://datasheet.ciiva.com/5821/1009688-5821398.pdf?src-supplier=Farnell, ComponentLink5URL=https://datasheet.ciiva.com/5821/1009688-5821398.pdf?src-supplier=Farnell, ComponentLink6Description=https://datasheet.ciiva.com/7648/1009712-7648886.pdf?src-supplier=Element14, ComponentLink6URL=https://datasheet.ciiva.com/7648/1009712-7648886.pdf?src-supplier=Element14, Connector Type=Receptacle,Socket,Rectangular, Contact Material="Copper Alloy,Copper", Contact Plating=Tin, Depth=21.3mm, Gender=Female, Height=14mm, Housing Material=PPE, Manufacturer Part Number=MX34020SF1, Mount="Free Hanging,Cable", Number of Contacts=20, Number of Positions=20, Number of Rows=2, Packaging=Tray, Pitch=0.087inch, Pricing 1="1=0.73000, 10=0.63800, 25=0.60000, 50=0.57500, 100=0.55000, 250=0.50000, 576=0.45000, 1152=0.40000, 2880=0.36250 (USD)", RoHS=Yes, Row Spacing=0.118inch, Stock 1=3393, Supplier 1=Digi-Key, Termination=Crimp, Width=25.1mm
J2: "JAE MX34 Series, 2.2mm Pitch 20 Way 2 Row Right Angle PCB Header, Solder Termination, 3A", Color=Grey, Current Rating=3A, Manufacturer="JAE Electronics", Package Quantity=288, Supplier Part Number 1=670-2924-ND, Category=Connectors, ComponentLink1Description=https://datasheet.ciiva.com/7621/1009688-7621584.pdf?src-supplier=Element14, ComponentLink1URL=https://datasheet.ciiva.com/7621/1009688-7621584.pdf?src-supplier=Element14, ComponentLink2Description=https://datasheet.ciiva.com/4554/sj038751-3818-4554108.pdf?src-supplier=Mouser, ComponentLink2URL=https://datasheet.ciiva.com/4554/sj038751-3818-4554108.pdf?src-supplier=Mouser, ComponentLink3Description=https://datasheet.ciiva.com/11754/0900766b80ddc6f0-11754159.pdf?src-supplier=RSComponents, ComponentLink3URL=https://datasheet.ciiva.com/11754/0900766b80ddc6f0-11754159.pdf?src-supplier=RSComponents, ComponentLink4Description=https://datasheet.ciiva.com/732/transportation-pg-v2-2-732931.pdf?src-supplier=Digi-Key, ComponentLink4URL=https://datasheet.ciiva.com/732/transportation-pg-v2-2-732931.pdf?src-supplier=Digi-Key, Connector Type="Male Pin,Rectangular", Contact Material=Brass, Contact Mating Length=0.303inch, Contact Plating=Tin, Gender=Male, Manufacturer Part Number=MX34020NF1, Mount="Through Hole", Number of Contacts=20, Number of Positions=20, Number of Rows=2, Orientation="Right Angle", Packaging=Rail/Tube, Pitch=0.087inch, Pricing 1="1=1.57000, 10=1.42100, 100=1.21800, 500=1.01500, 1000=0.87000, 5000=0.77140, 10000=0.75400 (USD)", REACH SVHC="No SVHC", RoHS=Yes, Row Spacing=0.118inch, Stock 1=10297, Supplier 1=Digi-Key, Termination=Solder
J3: library part CMP-2000-05118-1, "Micro USB B Type Receptacle, -55 to 85 degC, 5-Pin SMD, RoHS, Tape and Reel", Color=Black, Current Rating=1.8A, Flammability Rating=UL94V-0, Insulation Resistance=1000MOhms, Manufacturer=FCI, Operating Temperature Range=-55Cto+85C, Brand=FCI, Connector Type=MicroUSBTypeBreceptacle, Contact Material=CopperAlloy, Contact Plating=Gold, Datasheet URL=http://www.mouser.com/ds/2/154/10118192-793027.pdf, Datasheet Version="Rev. B, 05/2015", Factory Pack Quantity=1400, Gender=Female, Manufacturer URL=http://www.fci.com/, Mounting Angle=Right, Number of Contacts=5Contact, Packaging=Reel, Product=MicroUSBTypeBConnectors, Product Category=USBConnectors, RoHS=Details, Standard=USB2.0, Termination Style=SMD/SMT
LED1: library part CMP-1426-00010-1, "SMD mono-color Chip LED, WL-SMCW, Super Red", Color="Super Red", Manufacturer="Wuerth Elektronik", ComponentLink1Description="Manufacturer URL", ComponentLink1URL=http://www.we-online.com, ComponentLink2Description=Datasheet, ComponentLink2URL=http://katalog.we-online.com/led/datasheet/150080SS75000.pdf, PackageReference=0805_A, PartNumber=150080SS75000
LED2: library part CMP-1426-00008-1, "SMD mono-color Chip LED, WL-SMCW, Blue", Color=Blue, Manufacturer="Wuerth Elektronik", ComponentLink1Description="Manufacturer URL", ComponentLink1URL=http://www.we-online.com, ComponentLink2Description=Datasheet, ComponentLink2URL=http://katalog.we-online.com/led/datasheet/150080BS75000.pdf, PackageReference=0805_A, PartNumber=150080BS75000
P1: library part CMP-1502-00949-1, "THT Vertical Pin Header WR-PHD, Pitch 1.27 mm, Dual Row, 14 pins", Contact Resistance=20mOhm, Manufacturer="Wurth Elektronik", Operating Temperature=-40to105degC, Rated current=1A, Withstanding Voltage=500VAC, Working Voltage=100VAC, Datasheet URL=https://katalog.we-online.de/em/datasheet/62201421121.pdf, Gender=Male, Manufacturer URL=http://www.we-online.de, Mounting Technology=THT, Orientation=Vertical, Package Reference=62201421121, Packaging=Box, Part Number=62201421121, Pin Number=14, Pitch=1.27mm, Publisher=WurthElektronik, Row Number=Dual
R1 R2 R3 R4 R5 R6 R7 R8 R11 R12 R13 R22 R23: library part RMCF0603FT4K70, "Res Thick Film 0603 4.7K Ohm 1% 1/10W 100ppm/C Molded SMD SMD Paper T/R", Case Code (Imperial)=0603, Case Code (Metric)=1608, Manufacturer="Stackpole Electronics", Max Operating Temperature=155°C, Max Power Dissipation=100mW, Min Operating Temperature=-55°C, Resistance=4.7kR, Resistor Type="Thick Film", Supplier Part Number 1=RMCF0603FT4K70CT-ND, Temperature Coefficient=100ppm/°C, Tolerance=1%, Case/Package=0603, Category="Chip SMD Resistors", ComponentLink1Description=https://datasheet.ciiva.com/26835/getdatasheetpartid-486078-26835642.pdf?src-supplier=Verical, ComponentLink1URL=https://datasheet.ciiva.com/26835/getdatasheetpartid-486078-26835642.pdf?src-supplier=Verical, Contact Plating=Tin,Matte, Depth=0.8mm, Features="Automotive AEC-Q200", Height=0.022inch, Lead Free="Lead Free", Length=1.55mm, Manufacturer Part Number=RMCF0603FT4K70, Military Standard=Not, Mount="Surface Mount", Number of Terminations=2, Packaging="Tape and Reel", Power Rating=100mW, Pricing 1="1=0.10000, 10=0.01500, 100=0.00590, 1000=0.00265, 2500=0.00230 (USD)", Radiation Hardening=No, RoHS=Yes, Stock 1=1530231, Supplier 1=Digi-Key, Width=0.031inch
R9 R10: library part CMP-1659-00038-1, "Chip Resistor, 560 Ohm, +/- 1%, 0.1 W, -55 to 155 degC, 0603 (1608 Metric), RoHS, Tape and Reel", Case Code (Imperial)=0603, Case Code (Metric)=1608, Max Operating Temperature="155 degC", Min Operating Temperature="-55 degC", Power Rating="100 mW", Resistance=560R, Tolerance=1%, Voltage Rating="50 V", Case\Package=0603, ComponentLink1Description="Manufacturer URL", ComponentLink1URL=http://www.yageo.com/, ComponentLink2Description=Datasheet, ComponentLink2URL=http://www.yageo.com/documents/recent/PYu-RC_Group_51_RoHS_L_04.pdf, DatasheetVersion="Rev. 4, 02/2016", Height="0.45 mm", Length="1.6 mm", Mount="Surface Mount", PackageDescription="2-Pin Surface Mount Device, Body 1.6 x 0.8 mm", PackageReference=0603, Packaging="Tape and Reel", Pins=2, REACH SVHC="No SVHC", RoHSCompliant=true, Voltage Rating (DC)="50 V", Width="0.8 mm"
R14 R15: library part CMP-2000-03099-1, Manufacturer="Vishay Dale", Part Number=CRCW060322R0JNTA
SW1: "SWITCH TOGGLE DIP SPDT 150MA 30V / WIRED: / 1  2  3 / 4  5  6", Contact Current Rating=150mA, Manufacturer=Grayhill, Max Operating Temperature=85°C, Max Voltage Rating (DC)=30V, Min Operating Temperature=-40°C, Package Quantity=13, Supplier Part Number 1=GH7721-ND, Actuator Length=5.08mm, Actuator Type=Toggle, Body Material=Thermoplastic, Category="DIP Switches", ComponentLink1Description=https://datasheet.ciiva.com/16198/dip-series-76-and-78-spdt-16198550.pdf?src-supplier=Onlinecomponents.com, ComponentLink1URL=https://datasheet.ciiva.com/16198/dip-series-76-and-78-spdt-16198550.pdf?src-supplier=Onlinecomponents.com, ComponentLink2Description=https://datasheet.ciiva.com/2865/dip-series-76-and-78-spdt-2865964.pdf?src-supplier=Digi-Key, ComponentLink2URL=https://datasheet.ciiva.com/2865/dip-series-76-and-78-spdt-2865964.pdf?src-supplier=Digi-Key, Contact Material="Copper Alloy,Gold", Contact Plating=Gold, Current Rating=150mA, Depth=9.65mm, Electrical Life=2000Cycles, Lead Free="Lead Free", Length=0.78inch, Manufacturer Part Number=76STC02T, Max Current Rating=150mA, Mechanical Life=2000Cycles, Mount="Through Hole,PCB", Number of Circuits=4, Number of Positions=4, Orientation=Straight, Packaging=Rail/Tube, Pitch=0.1inch, Pricing 1="1=4.74000, 10=4.54200, 25=4.14720, 100=3.59410, 250=3.25836, 500=3.02140, 1000=2.80417, 2500=2.54745, 5000=2.36972 (USD)", Radiation Hardening=No, REACH SVHC="No SVHC", RoHS=Yes, Stock 1=149, Supplier 1=Digi-Key, Termination="PC Pins", Throw Configuration=SPDT, Voltage Rating=30V, Voltage Rating (DC)=30V, Washable=No
U1: library part CMP-1685-00014-1, "Fixed Positive Voltage Regulator, 7 to 25 V, 1.5 A, 0 to 125 degC, 3-Pin DDPAK (KTT), Green (RoHS / & no Sb/Br), Tape and Reel", Case Code (Imperial)=0603, Case Code (Metric)=1608, Max Operating Temperature="155 degC", Min Operating Temperature="-55 degC", Package Quantity=5000, Power Rating="100 mW", Resistance="220 Ohm", Tolerance=1%, Voltage Rating="50 V", Case\Package=0603, Code_JEDEC=TO-263, ComponentLink1Description="Manufacturer URL", ComponentLink1URL=http://www.ti.com/, ComponentLink2Description=Datasheet, ComponentLink2URL=http://www.ti.com/lit/ds/symlink/ua7805.pdf, DatasheetVersion="SLVS056P, 01/2015", Height="0.45 mm", Length="1.6 mm", Mount="Surface Mount", PackageDescription="3-Pin Surface Mount Device, Body 10.16 x 9.015 mm, Pitch 2.54 mm", PackageReference=KTT0003A, Packaging="Tape and Reel", Pins=2, REACH SVHC="No SVHC", RoHSCompliant=true, Voltage Rating (DC)="50 V", Width="0.8 mm"
U2: "8 SOIC 3.90mm(.150in) TUBECAN Flexible Data Rate Transceiver", Manufacturer=Microchip, Supplier Part Number 1=MCP2562FD-E/SN-ND, Category="Interface ICs", ComponentLink1Description=https://datasheet.ciiva.com/46406/1821190-46406053.pdf?src-supplier=Element14, ComponentLink1URL=https://datasheet.ciiva.com/46406/1821190-46406053.pdf?src-supplier=Element14, ComponentLink2Description=https://datasheet.ciiva.com/48512/mcp2562fd-e-mf-eng-tds-48512074.pdf?src-supplier=Distrelec, ComponentLink2URL=https://datasheet.ciiva.com/48512/mcp2562fd-e-mf-eng-tds-48512074.pdf?src-supplier=Distrelec, ComponentLink3Description=https://datasheet.ciiva.com/48473/20005284a-48473180.pdf?src-supplier=Avnet, ComponentLink3URL=https://datasheet.ciiva.com/48473/20005284a-48473180.pdf?src-supplier=Avnet, ComponentLink4Description=https://datasheet.ciiva.com/46406/1821190-46406061.pdf?src-supplier=Element14, ComponentLink4URL=https://datasheet.ciiva.com/46406/1821190-46406061.pdf?src-supplier=Element14, Manufacturer Part Number=MCP2562FD-E/SN, Pricing 1="1=0.96000, 25=0.80000, 100=0.73000 (USD)", RoHS=Yes, Stock 1=1433, Supplier 1=Digi-Key
U3: library part CMP-2000-07604-2, "IC REG LINEAR 3.3V 300MA SOT23-5", Case/Package=SOT-23-5, Dropout Voltage=380mV, Max Input Voltage=5.5V, Max Operating Temperature=125°C, Max Output Current=300mA, Min Input Voltage=2.5V, Min Operating Temperature=-40°C, Nominal Output Voltage=3.3V, Operating Supply Current=42uA, Power Supply Rejection Ratio (PSRR)=60dB, Quiescent Current=38uA, Accuracy=3%, Height=1.1mm, Length=2.9mm, Mount="Surface Mount", Number of Outputs=1, Number of Pins=5, Output Current=300mA, Output Type=Fixed, Output Voltage=3.3V, Packaging="Tape and Reel", REACH SVHC="No SVHC", Width=1.6mm
U4: library part CMP-1305-00036-1, "Single Supply Quad Comparators, 0 to 70 degC, 14-Pin SOIC, Pb-Free, Tape and Reel", Manufacturer="On Semiconductor", ComponentLink1Description="Manufacturer URL", ComponentLink1URL=http://www.onsemi.com/, ComponentLink2Description=Datasheet, ComponentLink2URL=http://www.onsemi.com/pub_link/Collateral/LM339-D.PDF, ComponentLink3Description="Package Specification", ComponentLink3URL=http://www.onsemi.com/pub_link/Collateral/751A-03.PDF, DatasheetVersion="Rev. 20", IO Typ (mA)=16, Mounting Technology="Surface Mount", PackageDescription="14-Pin Small Outline Integrated Circuit, Body 8.65 x 3.9 mm, Pitch 1.27 mm", PackageReference=SOIC-14-751A-03, PackageVersion="Rev. K, 05/2011", Packing="Tape and Reel", PartNumber=LM339DR2G, RoHS=TRUE
U5: library part CMP-0237-00257-3, "ARM Cortex-M3 32-bit MCU, 32 KB Flash, 10 KB Internal RAM, 37 I/Os, 48-pin LQFP, -40 to 105 degC, Tape and Reel", I/Os (High Current)=37, Operating Frequency(F) (Processor speed) (MHz)=72, Supply Voltage(Vcc) min (V)=2, A/D Converter="2x12-bit (10 Channel)", ComponentLink1Description="Manufacturer URL", ComponentLink1URL=http://www.st.com/web/en/home.html, ComponentLink2Description=Datasheet, ComponentLink2URL=http://www.st.com/st-web-ui/static/active/en/resource/technical/document/datasheet/CD00210843.pdf, ComponentLink3Description="Package Specification", ComponentLink3URL=http://www.st.com/st-web-ui/static/active/en/resource/technical/document/datasheet/DM00058181.pdf, Core="ARM Cortex-M3", DatasheetVersion="Rev. 6", FLASH Size (Prog) (kB)=32, Internal RAM Size (kB)=10, Mounting Technology="Surface Mount", PackageDescription="48-Pin Low Profile Quad Flat Package, 7 x 7 mm Body, 0.5 mm Pitch", PackageReference=LQFP48, PackageVersion="Rev. 6, 06/2013", Packing="Tape and Reel", PartNumber=STM32F103C6T7ATR
U6: library part CMP-0237-00046-3, "ARM Cortex-M3 32-bit MCU, 32 KB Flash, 10 KB Internal RAM, 37 I/Os, 48-pin UFQFPN, -40 to 85 degC, Tray", I/Os (High Current)=37, Operating Frequency(F) (Processor speed) (MHz)=72, Supply Voltage(Vcc) min (V)=2, A/D Converter="2x12-bit (10 Channel)", ComponentLink1Description="Manufacturer URL", ComponentLink1URL=http://www.st.com/web/en/home.html, ComponentLink2Description=Datasheet, ComponentLink2URL=http://www.st.com/st-web-ui/static/active/en/resource/technical/document/datasheet/CD00210843.pdf, ComponentLink3Description="Package Specification", ComponentLink3URL=http://www.st.com/st-web-ui/static/active/en/resource/technical/document/data_brief/DM00071938.pdf, Core="ARM Cortex-M3", DatasheetVersion="Rev. 6", FLASH Size (Prog) (kB)=32, Internal RAM Size (kB)=10, Mounting Technology="Surface Mount", PackageDescription="48-Pin Ultra Thin Fine Pitch Quad Flat No-Lead, 7 x 7 x 0.6 mm Body, 0.5 mm Pitch, Exposed Pad", PackageReference=UFQFPN48, PackageVersion="Rev. 1, 04/2013", Packing=Tray, PartNumber=STM32F103C6U6A
X1: library part CMP-2000-05034-1, "Microprocessor Crystal, 8 MHz, 18 PF, -40 to 85 degC, 2-Pin SMD, RoHS, Tape and Reel", ESR (Equivalent Series Resistance)=100Ohm, Frequency=8MHz, Frequency Stability=±30ppm, Frequency Tolerance=±20ppm, Load Capacitance=18pF, Manufacturer=Abracon, Operating Mode=Fundamental, Operating Temperature=-40degC~85degC, Package / Case=2-SMD, Package Description="2-Pin Surface Mount Device, Body 6 x 3.5 mm", Package Reference=ABM7, Standard Package=1,000, 3D Model="ABM7.pdf /  / ABM7.stp", Catalog Drawings="ABM7SeriesTop /  / ABM7SeriesSide /  / ABM7SeriesBottom", Category=CrystalsandOscillators, Datasheet URL=https://datasheet.ciiva.com/1357/1718755-1357277.pdf, Datasheet Version=Dec-17, Family=Crystals, Featured Product=ABM7andABM11Crystals, Height="0.055\"(1.40mm)", Manufacturer URL=http://www.abracon.com/, Mounting Type=SurfaceMount, Online Catalog=ABM7Series, Other Names="535-9831-2 / ABM7-8.000MHZ-D-2-Y-T / ABM78000MHZD2YT", Packaging=Tape&Reel(TR), RoHS Information=RoHS2/REACHCompliance, Series=ABM7, Size / Dimension="0.236\"Lx0.138\"W(6.00mmx3.50mm)", Type=MHzCrystal

## Via types
v1: diameter 23.62, hole 12, Top Layer to Bottom Layer, 72 vias
v2: diameter 19.68, hole 7.87, Top Layer to Bottom Layer, 25 vias
v3: diameter 39.37, hole 19.68, Top Layer to Bottom Layer, 8 vias

## Nets (pads, with @x,y where several pads share a name; then routed paths per layer and width w, separated by ;. In a path a pad name is that pad's centre, name@x,y a point inside that pad or via, vN(x,y) a via of type N, cw(c..) or ccw(c..) an arc to the next point about the centre after c; other vN are vias at no path point)
3V3_VREF: C14.1 R3.1 R6.2 U4.8 U4.10 | length 363.6
  Bottom Layer w15: U4.10 2094.71,2641.21 2103.5,2650 2185,2650 2194.71,2640.29 U4.8 2221.32,2609.89 2231.49,2599.73 C14.1 2267.39,2599.73 2275.3,2607.63 R3.1
12V_VREF: C13.1 R22.1 R23.2 U4.4 U4.6 | length 591.7
  Bottom Layer w10: U4.4 2051.13,2825.76 2051.13,2907.82 2060.86,2917.56 2106.18,2917.56 2144.71,2879.03 2144.71,2782.59 2251.84,2675.46 2251.84,2672.5 2261.6,2662.74 C13.1 2267.52,2659.78 2326.43,2659.78 2378.48,2659.78 R22.1
+3V3: C7.1 C8.1 C10.1 C11.1 C12.1 C15.1 C16.1 P1.3 R3.2 R4.2 R7.2 R12.2 U2.5 U3.5 U5.1 U5.9 U5.24 U5.36 U5.48 U6.1 U6.9 U6.24 U6.36 U6.48 | length 1114.3
  Bottom Layer w10: v1(2030,3395) 2032.61,3392.39 2071.23,3392.39 C11.1 2097.72,3388.62 2106.45,3379.89 2106.45,3323.71 2125.18,3304.98 2125.34,3304.98 U5.9@2131.02,3299.29 ; U5.1 U6.1 2178.54,3141.73 2178.62,3141.65 2178.62,3033.54 2165,3019.92 2165,2985.35 C7.1 2165.35,2986.03 2206.73,3027.41 U5.48 ; U5.24 2440.04,3408.46 2498.62,3467.05 C12.1 v1(2535,3470)
  Bottom Layer w15: R4.2 1889.25,2994.25 1890,2995 v1(1890,3000) ; v1(2250,2445) 2249.41,2445.59 2206.77,2445.59 C8.1 2206.18,2408.82 2231.61,2383.39 U2.5 ; v1(2380,2515) 2380.72,2515.72 2380.72,2547.86 R3.2 ; v1(3369.84,2965.16) 3369.74,2965.26 3369.74,3009.91 C16.1 3369.65,3061.93 3385.8,3078.08 U3.5 ; v1(3745,3275) R12.2
  other v1: 2166.5,3021.42
+5V0: C2.1 C9.1 D2.1 U1.3 U2.3 | length 1767.2
  Top Layer w15: v1(2510,2781.69) 2537.91,2809.6 2537.91,2812.91 2570,2845 v1(2575,2845)
  Bottom Layer w15: U2.3 2083.44,2332.7 2012.97,2332.7 2012.28,2332.01 C9.1 2009.33,2409.33 2045,2445 2079.49,2445 2124.49,2490 2425,2490 2510,2575 v1(2510,2781.69) ; v1(2575,2845) 2575,2871.38 2584.78,2881.16 2584.78,2884.11 2592.05,2891.38 C2.1 2597.95,2891.38 2605.22,2898.64 2612.65,2898.64 2614,2900 2655.65,2900 2663.37,2907.72 U1.3 2667.83,2833.79 2676.62,2825 2902.36,2825 3100,3022.64 D2.1
+12V0: C1.1 C4.1 F1.2 R1.2 R2.2 R5.2 R8.2 R22.2 U1.1 U4.3 | length 2539.5
  Top Layer w20: v1(1950,2425) 1950,2583.08 2015,2648.08 v1(2015,2770) ; v1(2910,2875) v1(2955,2830)
  Bottom Layer w15: R22.2 2381.45,2731.45 2456,2806 2668.75,2806 2931,2806 v1(2955,2830)
  Bottom Layer w20: v1(1950,2425) 1923.07,2451.93 1923.07,2472.91 1925.04,2474.89 1993.98,2474.89 R8.2 ; v1(2015,2770) 1994.71,2790.29 U4.3 1994.71,2859.24 2017.76,2882.29 2022.68,2882.29 2025.47,2885.09 R5.2 ; v1(2910,2875) 2877.52,2875 2867.83,2884.69 U1.1 2870.12,2910 2950,2910 3035,2995 3035,3398.28 3046.72,3410 3095.23,3410 C4.1 ; C4.1@3123.62,3413.85 C1.1 ; C4.1@3125.86,3405.23 3165.86,3365.24 3165.86,3349.14 3180,3335 3300,3335 3348.31,3383.31 F1.2
+B_BACKUP: J1.10 J2.10 | length 1216.8
  Top Layer w15: J1.10 3404.16,2595 3555,2595 3595,2635 3685,2635 3710,2660 3710,2786.21 3701.21,2795 3700,2795 3690,2805 3578.79,2805 3565.71,2818.08 3565.71,2915.56 3568.52,2918.36 v1(3568.52,3018.17) ; v1(3570,3140) 3570,3327.8 3612.52,3370.32 J2.10
  Bottom Layer w15: v1(3568.52,3018.17) 3569.26,3018.92 3569.26,3139.26 v1(3570,3140)
ACC_CAN_H: J1.7 J2.7 | length 868.9
  Top Layer w8: J1.7 3140.69,2599.06 3161.53,2619.9 3173.25,2619.9 3211.35,2658 3272.5,2658 3304.91,2690.41 3304.91,2965.64 3309.6,2970.33 3310.19,2970.33 3450.33,3110.47 J2.7
ACC_CAN_L: J1.18 J2.18 | length 733.1
  Top Layer w8: J1.18 3168.24,2712.81 3211.05,2670 3267.53,2670 3291.91,2694.38 3291.91,2969.62 3304.63,2982.33 3305.22,2982.33 3445.36,3122.47 3445.5,3122.47 3476.81,3153.78 J2.18
BLUE_LED: R10.1 U5.25 U6.25 | length 1877.1
  Top Layer w8: v1(2524.11,3418.84) 2549.54,3393.42 2549.54,3368.78 2452,3271.24 2452,3110.6 2220,2878.6 2220,2755 2570,2405 2914.36,2405 v1(2914.68,2405.32)
  Bottom Layer w8: U6.25 U5.25 2473.82,3358.62 2502.66,3358.62 2507.91,3363.88 2507.91,3402.64 v1(2524.11,3418.84) ; R10.1 2915,2304.53 2914.68,2304.85 v1(2914.68,2405.32)
BOOT0: R11.2 U5.44 U6.44 | length 130.5
  Bottom Layer w10: U5.44 2285.47,3059.53 2319.06,3025.94 R11.2@2319.06,2974.99
CAN1_RX: U2.4 U5.45 U6.45 | length 895.3
  Top Layer w10: v1(2033.64,2394.19) 2014.19,2413.65 2008.11,2413.65 2000,2421.76 2000,2585 2193.19,2778.19 2193.19,2959.59 2229.62,2996.01 2238.02,2996.01 v1(2278.08,3036.08)
  Bottom Layer w6: U5.45@2265.79,3091.85 2265.79,3058.34 2274.71,3049.42 2274.71,3039.45 v1(2278.08,3036.08)
  Bottom Layer w10: v1(2033.64,2394.19) 2035.8,2394.19 2046.61,2383.39 U2.4
CAN1_TX: U2.1 U5.46 U6.46 | length 1046.5
  Top Layer w10: v1(2025,2235) 2025,2355 1982.46,2397.54 1982.46,2588.67 2179.19,2785.4 2179.19,2969.67 v1(2249.76,3040.24)
  Bottom Layer w6: U5.46@2246.1,3091.85 2246.1,3058.34 2249.76,3054.68 v1(2249.76,3040.24)
  Bottom Layer w10: v1(2025,2235) 2025.81,2234.19 2083.33,2234.19 U2.1
EPS_TO_LKAS_RX: J1.12 SW1.C2 | length 1679.5
  Top Layer w10: v1(2621.81,2514.03) 2693.85,2442 3398.23,2442 3455.76,2499.53 3525.72,2499.53 3550.25,2524.06 3739.53,2524.06 3892.17,2371.41 SW1.C2
  Bottom Layer w10: v1(2621.81,2514.03) 2575,2560.85 2575,2630 2648.56,2703.56 J1.12
EPS_TO_LKAS_TX: J2.12 R2.1 SW1.2B U4.5 | length 2538.5
  Top Layer w10: v1(2140,2685) 2140,2500 2270,2370 2654.86,2370 v1(2655,2369.86)
  Bottom Layer w15: R2.1 2084.53,2870.47 2095,2860 2095,2819.63 U4.5 2094.71,2730.29 v1(2140,2685) ; v1(2655,2369.86) 2655,2370 2747.59,2462.59 2747.59,2630.84 2778.05,2661.31 3351.31,2661.31 3365,2675 3433.82,2675 3474.72,2634.09 J2.12 3690.91,2634.09 3853.59,2471.41 SW1.2B
EPS_TO_LKAS_TX1: R1.1 SW1.2A U4.14 | length 1944.3
  Top Layer w10: v1(2090,2495) 2090,2450 2100.38,2439.62 2205,2335 2880,2335 2959,2414 3409.83,2414 3467.36,2471.53 SW1.2A
  Bottom Layer w10: U4.14 1894.71,2580.29 1922.71,2552.29 R1.1 1927.63,2534.76 1962.4,2500 2012.11,2500 2033.92,2478.19 2073.19,2478.19 v1(2090,2495)
F_CAN_H: J1.2 J2.2 U2.7 | length 1714.8
  Top Layer w8: J1.2 2707.61,2575.01 2784.62,2498 3304.16,2498 3364.97,2558.81 3364.97,2636.98 3405.39,2677.4 J2.2
  Bottom Layer w10: U2.7 2510.47,2283.39 2707.61,2480.53 J1.2
F_CAN_L: J1.13 J2.13 U2.6 | length 1809.7
  Top Layer w8: J1.13 2735.17,2700.06 2747.59,2687.64 2747.59,2557.41 2755,2550 2795,2510 3299.19,2510 3352.97,2563.78 3352.97,2641.95 3355,2643.98 3355,2647.77 3427.94,2720.71 J2.13
  Bottom Layer w10: U2.6 2526.53,2333.39 2666.81,2473.67 2666.81,2554.87 2666.05,2555.63 2666.05,2643.69 2735.17,2712.81 J1.13
GND: C1.2 C2.2 C3.2 C4.2 C5.2 C6.2 C7.2 C8.2 C9.2 C10.2 C11.2 C12.2 C13.2 C14.2 C15.2 C16.2 J1.14 J2.14 J3.5 LED1.1 LED2.1 P1.5 P1.7 P1.11 R6.1 R11.1 R13.2 R23.1 U1.2 U1.4 U2.2 U2.8 U3.2 U4.12 U5.8 U5.23 U5.35 U5.47 U6.8 U6.23 U6.35 U6.47 U6.49 | length 2751.6
  Top Layer w15: LED2.1 3180,2247.44 v1(3180,2203.19) ; LED1.1 3360,2247.44 v1(3360,2205) ; J3.5 3803.94,2928.94 v1(3805,2930)
  Bottom Layer w6: U1.4@2766.2,3246.63 2852.11,3246.63 2940,3158.75 v3(2940,3070)
  Bottom Layer w10: v1(2100,3056.23) 2130.15,3056.23 C10.2 ; C7.2 2214.65,2960.35 v1(2235,2940) ; C7.2@2214.65,2986.03 2215.68,2985 R11.1 2265.94,2989.92 2226.71,3029.16 2226.42,3029.16 U5.47 ; U5.23 2403.58,3433.9 2409.35,3439.66 2409.35,3439.82 2426.81,3457.28 2441.61,3457.28 2451.38,3467.05 C12.2 2446.38,3475 v1(2410,3475)
  Bottom Layer w12: C6.2 1910.94,3225.52 v1(1910.94,3177.98) 1910.94,3130.44 C5.2 ; v1(1960,2265) 1979.76,2284.76 C9.2 ; v1(1987.29,2658.29) 1987.29,2655.15 1994.58,2647.85 1994.58,2610.01 U4.12 ; v1(2030,3345) 2031.81,3343.19 2073.19,3343.19 2073.19,3326.81 2120.47,3279.53 U5.8 ; v1(2210,2555) 2211.26,2553.74 2263.18,2553.74 C14.2 2266.89,2550.03 2323.99,2550.03 R6.1 ; C13.2 C13.2@2264.78,2710.2 ; v1(2265,2745) 2264.78,2744.78 C13.2@2264.78,2710.2 ; R23.1 2323.23,2713.19 2267.76,2713.19 C13.2@2264.78,2710.2
  Bottom Layer w15: C9.2 2010.02,2284.07 2083.44,2284.07 U2.2 ; v1(2122.19,2452.19) 2123.84,2450.54 2154.58,2450.54 2160,2445.12 2160,2295 2221.61,2233.39 U2.8 ; R13.2 3765.23,2610.24 3814.76,2610.24 v1(3815,2610)
  Bottom Layer w25: v3(2575,3015) 2587.5,3015 2595,3007.5 C2.2 ; U1.2 2767.83,3007.83 v1(2770,3010) U1.4@2770,3322.87 ; U1.4 U1.4@2770,3322.87 ; U1.4@2770,3246.63 U1.4@2770,3322.87 ; v1(3030,3436.19) 3030,3445.81 3049.19,3465 C1.2 ; C4.2 3104.77,3300 v1(3160,3300) ; v1(3193.78,3153.78) 3203.43,3144.13 3242.87,3144.13 3263.61,3123.39 3275.52,3123.39 3282.94,3115.97 3289.63,3115.97 U3.2 ; v1(3296.6,3003.14) 3299.07,3005.61 3316.98,3005.61 3320.35,3008.97 C16.2
  other v2: 2228.39,3163.39 2271.69,3163.39 2315,3163.39 2358.31,3163.39 2401.61,3163.39 2228.39,3206.69 2271.69,3206.69 2315,3206.69 2358.31,3206.69 2401.61,3206.69 2228.39,3250 2271.69,3250 2315,3250 2358.31,3250 2401.61,3250 2228.39,3293.31 2271.69,3293.31 2315,3293.31 2358.31,3293.31 2401.61,3293.31 2228.39,3336.61 2271.69,3336.61 2315,3336.61 2358.31,3336.61 2401.61,3336.61
  other v3: 2675,3015 2850,3020 2940,3020 2625,3060 2720,3060 2890,3060
IGN1: F1.1 J1.19 J2.19 | length 780.9
  Top Layer w50: J1.19 3254.86,2761.44 3245,2771.3 3245,3010.67 3474.72,3240.39 J2.19
  Bottom Layer w50: F1.1 3357.15,3239.41 3497.37,3239.41 J2.19
LDW_OFF_IND: J1.11 J2.11 | length 1163
  Top Layer w15: J1.11 2561.95,2712.81 2603.51,2671.25 2648.75,2671.25 2659.97,2660.03 2665,2655 2665,2535 2730,2470 3397.24,2470 3474.72,2547.48 J2.11
LDW_OFF_SW: J1.8 J2.8 | length 997.5
  Top Layer w15: J1.8 3227.3,2607.41 3245.83,2625.94 3262.36,2625.94 3310.17,2673.75 3357.65,2673.75 3410,2726.1 3410,3000 3435,3025 3540.96,3025 3585.96,3070 3680,3070 3710,3100 3710,3146.85 3659.76,3197.09 J2.8
LKAS_TO_EPS_RX: J2.1 SW1.C1 | length 299.5
  Bottom Layer w15: SW1.C1 3646.53,2371.53 3673.79,2398.79 3673.79,2553.14 3667.44,2559.49 3667.44,2572.26 3648.91,2590.79 J2.1
LKAS_TO_EPS_TX: J1.1 R5.1 SW1.1B U4.7 | length 2287.7
  Top Layer w10: v1(2240.81,2820) 2241.81,2819 2241.81,2803.19 2446.37,2598.63 J1.1 2619.38,2597.01 2619.38,2542.45 2600,2523.07 2600,2505 2645,2460 2645.85,2460 2677.85,2428 3404.03,2428 3461.56,2485.53 3531.52,2485.53 3556.05,2510.06 3649.94,2510.06 3888.59,2271.41 SW1.1B
  Bottom Layer w8: R5.1 2101.32,2955.01 2112,2944.33 2112,2939.82 2194.71,2857.11 U4.7
  Bottom Layer w10: U4.7 2195.37,2820 v1(2240.81,2820)
LKAS_TO_EPS_TX1: R8.1 SW1.1A U4.13 | length 1900.2
  Top Layer w10: v1(2050,2500) 2050,2465 2194,2321 2885.8,2321 2964.8,2400 3390,2400 3518.47,2271.53 SW1.1A
  Bottom Layer w10: U4.13 1944.71,2598.08 1951.13,2591.66 1954.06,2591.66 1994.81,2550.91 R8.1 1995.75,2534.06 2015.94,2534.06 v1(2050,2500)
NetC3_1: C3.1 D1.2 D2.2 U3.1 U3.3 | length 556.8
  Bottom Layer w20: D1.2 3223.31,3234.09 3198.86,3209.65 D2.2 3100,3191.93 3197.1,3094.83 C3.1 3253.2,3094.83 3266.96,3081.07 3287.13,3081.07 U3.1 3328.08,3078.08 3340,3090 3340,3138.28 3325.4,3152.88 U3.3
NetLED1_2: LED1.2 R9.2 | length 433.8
  Top Layer w10: v1(3300,2320) 3302.91,2320 3313.34,2330.43 LED1.2
  Bottom Layer w10: R9.2 3205,2225 v1(3300,2320)
NetLED2_2: LED2.2 R10.2 | length 231.2
  Top Layer w15: v1(3125,2295) 3126.65,2296.65 3139.93,2296.65 3175.72,2332.43 LED2.2
  Bottom Layer w15: R10.2@2971.34,2312 2971.34,2308.06 2979.59,2299.81 2983.56,2299.81 2988.37,2295 v1(3125,2295)
NRST: P1.12 R12.1 U5.7 U6.7 | length 2267.4
  Top Layer w8: v1(1995,3330) 1995,3395 2095.81,3495.81 3729.19,3495.81 P1.12
  Bottom Layer w8: v1(1995,3330) 2006.39,3318.61 2061.59,3318.61 2120.36,3259.84 U5.7 ; R12.1 3749.92,3375 3769.92,3395 P1.12
OSC_IN: C5.1 U5.5 U6.5 X1.2 | length 330.3
  Bottom Layer w10: C5.1 1915.71,3070.55 1940.51,3095.35 X1.2 2028.78,3095.35 2061.18,3127.76 2061.18,3171.18 2110.47,3220.47 U5.5
OSC_OUT: C6.1 U5.6 U6.6 X1.1 | length 264.5
  Bottom Layer w10: C6.1 1996.1,3283.54 2039.49,3240.16 U5.6
PA0: U5.10 U6.10
PA1: U5.11 U6.11
PA4: U5.14 U6.14
PA5: U5.15 U6.15
PA6: U5.16 U6.16
PA7: U5.17 U6.17
PA8: U5.29 U6.29
PA15: U5.38 U6.38
PB0: U5.18 U6.18
PB1: U5.19 U6.19
PB2: U5.20 U6.20
PB3: U5.39 U6.39
PB4: U5.40 U6.40
PB5: U5.41 U6.41
PB6: U5.42 U6.42
PB7: U5.43 U6.43
PB10: U5.21 U6.21
PB11: U5.22 U6.22
PB14: U5.27 U6.27 | length 20.7
  Bottom Layer w10: U6.27 U5.27
PB15: U5.28 U6.28
PC13: U5.2 U6.2
PC14: U5.3 U6.3
PC15: U5.4 U6.4
SHIELD: J3.6 J3.7 J3.8 J3.9 J3.10 J3.11 R13.1 | length 648.8
  Top Layer w10: J3.6 3764.61,2754.65 3791.1,2728.15 J3.8@3863.03,2728.15 ; J3.7 3837.44,2999.8 J3.9 J3.11 J3.10 J3.8 J3.8@3863.03,2728.15 ; v1(3810,2670) 3812.61,2672.61 3812.61,2677.72 J3.8@3863.03,2728.15
  Bottom Layer w10: R13.1 3765.23,2669.76 3809.76,2669.76 v1(3810,2670)
STATUS: R9.1 U5.26 U6.26 | length 1855.5
  Top Layer w8: v1(2528.72,3380) 2525,3380 2440,3295 2440,3115.57 2208,2883.57 2208,2748.62 2565.95,2390.67 2839.33,2390.67 2843.66,2386.34 2844.44,2386.34 2850.77,2380 v1(2855,2380)
  Bottom Layer w8: U6.26 U5.26 2518.58,3338.58 2528.72,3348.72 v1(2528.72,3380) ; v1(2855,2380) 2855,2284.41 2910.47,2228.94 R9.1
SWCLK: P1.6 U5.37 U6.37 | length 1760.6
  Top Layer w8: v1(2505,3065) 2505,3108.5 2524.43,3127.93 2524.43,3135.69 2804.11,3415.38 3429.96,3415.38 3450.77,3436.19 v1(3455,3436.19)
  Bottom Layer w8: U5.37@2423.27,3091.85 2478.15,3091.85 v1(2505,3065) ; v1(3455,3436.19) 3455.14,3436.32 3470.81,3436.32 3479.49,3445 3520,3445 3571.5,3393.5 3571.5,3269.76 3596.26,3245 P1.6
SWDIO: P1.4 U5.34 U6.34 | length 1758.2
  Top Layer w7: v1(2535.93,3095.48) 2535.93,3130.93 2808.88,3403.88 3434.73,3403.88 3438.41,3407.57 v1(3455,3407.57)
  Bottom Layer w7: U5.34@2473.46,3181.42 2513.58,3181.42 2538.19,3156.81 2538.19,3097.74 v1(2535.93,3095.48) ; v1(3455,3407.57) 3458.32,3407.57 3484.25,3433.5 3506.5,3433.5 3560,3380 3560,3265 3591.5,3233.5 3791.5,3233.5 P1.4
UART2_RX: R4.1 U4.2 U5.13 U6.13 | length 806.5
  Top Layer w10: v1(2077.98,2994.19) 2102.38,2994.19 2121.81,3013.62 2121.81,3101.81 2155.32,3135.32 2155.32,3274.39 2152.46,3277.25 v1(2152.46,3420)
  Bottom Layer w10: U4.2 1946.51,2821.14 1946.51,2889.27 R4.1 1948.31,2895.99 1966.61,2914.29 1971.85,2914.29 1990,2932.44 1990,2975 2010,2995 2077.17,2995 v1(2077.98,2994.19) ; v1(2152.46,3420) 2153.17,3420 2164.7,3408.46 U5.13
UART2_TX: U4.9 U5.12 U6.12 | length 1071.3
  Top Layer w10: v1(2055,2735) 2047.51,2742.49 2047.51,3060.29 2120,3132.77 v1(2120,3420)
  Bottom Layer w10: v1(2055,2735) 2055,2675.66 2070,2660.66 2070,2575 2080,2565 2139.14,2565 2145,2570.86 2145,2609.6 U4.9 ; v1(2120,3420) 2120.45,3419.55 2120.45,3368.92 U5.12@2131.02,3358.35